# EAGLE board swdtousb_seeed (EAGLE 7.1.0)
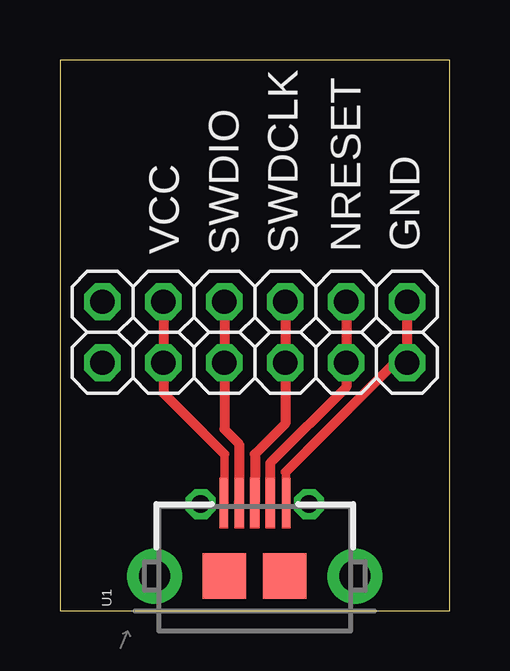
[diagram p0: board, top side]

Size 16.26 x 22.95 mm. Coordinates in mm from the lower left corner, seen from the top.
Outline: 0,0 16.26,0 16.26,22.95 0,22.95 0,0
Copper layers (1*16): Top 0.035mm / dielectric 1.5mm / Bottom 0.035mm
Design rules "SeeedStudio_2layer_DRU_no_angle_20140221": minimum track width 6mil, minimum drill 12mil, track to track 6mil, track to pad 6mil, pad to pad 6mil, via to via 6mil, smd to smd 0mil, copper to edge 10mil, drill to drill 10mil, minimum pad ring 10mil, minimum via ring 6mil, stop-mask expansion 2mil, vias tented up to drill 100mil, thermal gap 10mil

## Footprints (pad centres in the part's own frame; a part is rotated, then mirrored left to right if it is on the bottom)
1X06 = drill 1.016 octagon: 1 -6.35,0; 2 -3.81,0; 3 -1.27,0; 4 1.27,0; 5 3.81,0; 6 6.35,0
USB-AB-MICRO = smd 2.1 x 0.4: D+ 3.05,0; D- 3.05,0.65; ID 3.05,-0.65 | smd 2.1 x 0.356: GND 3.05,-1.3; VBUS 3.05,1.3 | drill 1.3 pad 2.286: P$1 0,-4.175; P$2 0,4.175 | drill 0.737 pad 0.737 octagon: P$3 3,-2.261; P$4 3,2.261 | smd 1.9 x 1.8: P$6 0,1.275; P$7 0,-1.25

## Placement (x,y rotation side)
JP1  [1X06]  8.13,10.34 180 top
JP2  [1X06]  8.13,12.88 180 top
U1  [USB-AB-MICRO]  8.13,1.45 90 top

## Library data of the parts
JP1 JP2 = adafruit
U1 = lightmeter

## Nets
GND: JP1.1 JP2.1 U1.GND
NRESET: JP1.2 JP2.2 U1.ID
SWDCLK: JP1.3 JP2.3 U1.D+
SWDIO: JP1.4 JP2.4 U1.D-
VCC: JP1.5 JP2.5 U1.VBUS

## Tracks (layer width: path | path; a pad name or v marks a point on that pad's centre or on a via)
GND
  Top 0.356: 9.42,5.79 U1.GND
  Top 0.406: 9.42,5.79 13.97,10.34 JP1.1 JP2.1
NRESET
  Top 0.406: U1.ID 8.76,4.51 8.76,6.15 11.94,9.32 JP1.2 JP2.2
SWDCLK
  Top 0.406: U1.D+ 8.13,6.53 9.4,7.8 JP1.3 JP2.3
SWDIO
  Top 0.406: U1.D- 7.47,6.96 6.86,7.57 JP1.4 JP2.4
VCC
  Top 0.356: 6.86,6.53 6.86,4.53 U1.VBUS
  Top 0.406: 6.86,6.53 4.32,9.07 JP1.5 JP2.5

## Text on the board
tPlace: NRESET | GND | VCC | SWDIO | SWDCLK